# EAGLE board AVR_12V_reset4_forPrinting (EAGLE 8.5.2)
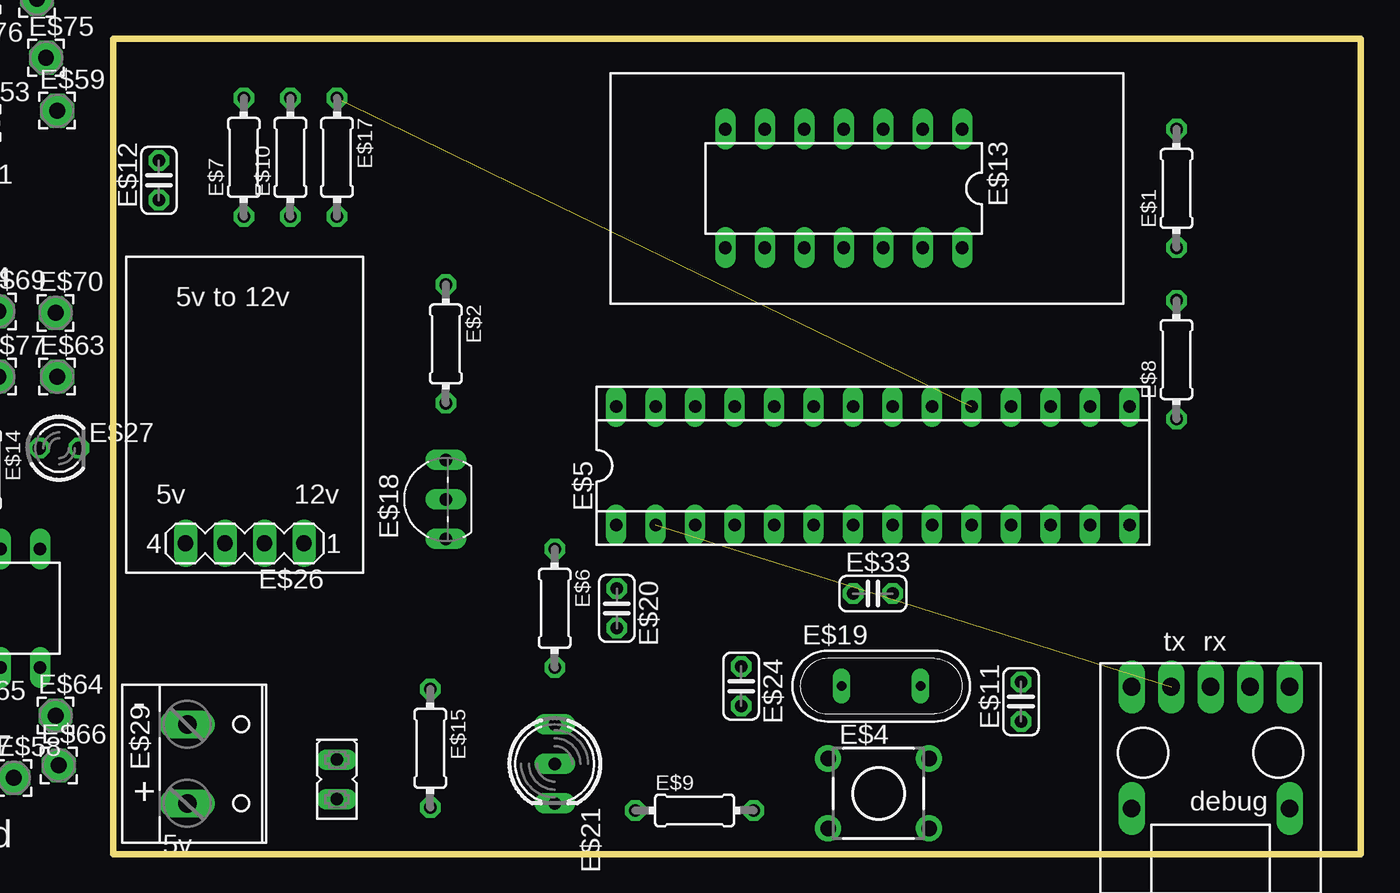
[diagram p0: board, top side]
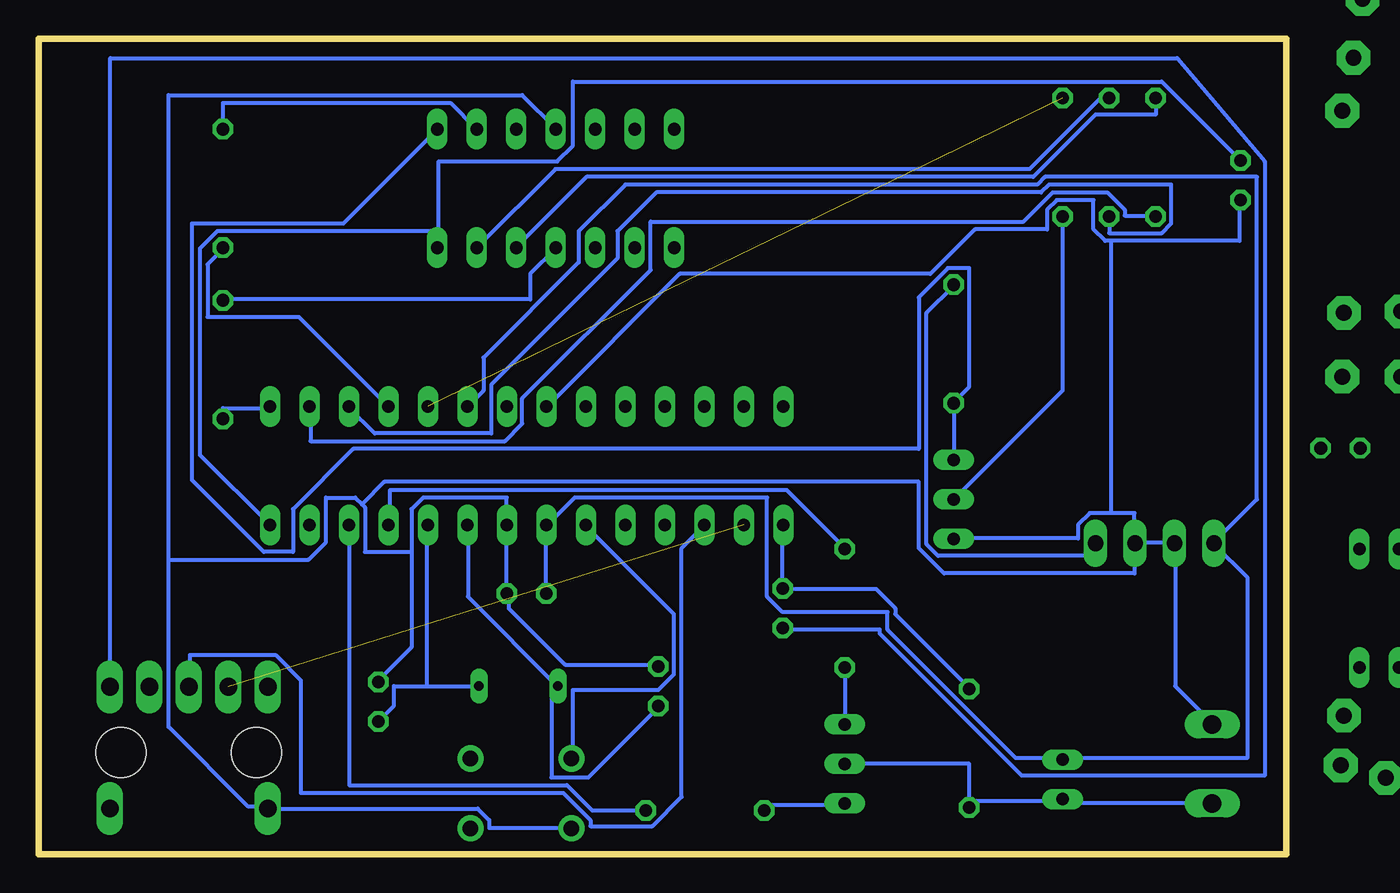
[diagram p1: board, bottom side, seen from below]

Size 80.25 x 52.42 mm. Coordinates in mm from the lower left corner, seen from the top.
Outline: 0,0 0,52.42 80.25,52.42 80.25,0 0,0
Copper layers (1*16): Top 0.035mm / dielectric 1.5mm / Bottom 0.035mm
Design rules "default": minimum track width 10mil, minimum drill 24mil, track to track 8mil, track to pad 8mil, pad to pad 8mil, via to via 8mil, smd to smd 8mil, copper to edge 40mil, drill to drill 8mil, minimum pad ring 10mil, minimum via ring 8mil, stop-mask expansion 4mil, vias tented up to drill 0mil, thermal gap 10mil

## Footprints (pad centres in the part's own frame; a part is rotated, then mirrored left to right if it is on the bottom)
0204/7 = drill 0.813 octagon: 1 -3.81,0; 2 3.81,0
FE02-1 = drill 0.813 long: 1 -1.27,0; 2 1.27,0
TL1105 = drill 1 pad 1.676: 1 -2.25,3.25; 2 2.25,3.25; 3 -2.25,-3.25; 4 2.25,-3.25
SOCKET-28-3 = drill 0.813 long: 1 -16.51,-3.81; 2 -13.97,-3.81; 3 -11.43,-3.81; 4 -8.89,-3.81; 5 -6.35,-3.81; 6 -3.81,-3.81; 7 -1.27,-3.81; 8 1.27,-3.81; 9 3.81,-3.81; 10 6.35,-3.81; 11 8.89,-3.81; 12 11.43,-3.81; 13 13.97,-3.81; 14 16.51,-3.81; 15 16.51,3.81; 16 13.97,3.81; 17 11.43,3.81; 18 8.89,3.81; 19 6.35,3.81; 20 3.81,3.81; 21 1.27,3.81; 22 -1.27,3.81; 23 -3.81,3.81; 24 -6.35,3.81; 25 -8.89,3.81; 26 -11.43,3.81; 27 -13.97,3.81; 28 -16.51,3.81
C025-024X044 = drill 0.813 octagon: 1 -1.27,0; 2 1.27,0
DIL14 = drill 0.813 long: 1 -7.62,-3.81; 2 -5.08,-3.81; 3 -2.54,-3.81; 4 0,-3.81; 5 2.54,-3.81; 6 5.08,-3.81; 7 7.62,-3.81; 8 7.62,3.81; 9 5.08,3.81; 10 2.54,3.81; 11 0,3.81; 12 -2.54,3.81; 13 -5.08,3.81; 14 -7.62,3.81
USB-MICRO-PCB = drill 1.143 long: P$1 -5.08,6.35; P$2 -2.54,6.35; P$3 0,6.35; P$4 2.54,6.35; P$5 5.08,6.35; P$6 5.08,-1.47; P$7 -5.08,-1.47 | hole 3.2: -4.34,2.12; 4.36,2.12
TO92- = drill 0.813 long: 1 2.54,0; 2 0,0; 3 -2.54,0
QS = drill 0.61 long: 1 -2.54,0; 2 2.54,0
DUOLED5MM = drill 0.813 long: AG -2.54,0; AR 2.54,0; K 0,0
MA04-1 = drill 1.016 long: 1 -3.81,0; 2 -1.27,0; 3 1.27,0; 4 3.81,0
LED3MM = drill 0.813 octagon: A -1.27,0; K 1.27,0
W237-132 = drill 1.194 long: 1 -2.54,-0.635; 2 2.54,-0.635
MCS10B = drill 1.016 pad 2.159 octagon: MP 0,0
DIL08 = drill 0.813 long: 1 -3.81,-3.81; 2 -1.27,-3.81; 3 1.27,-3.81; 4 3.81,-3.81; 5 3.81,3.81; 6 1.27,3.81; 7 -1.27,3.81; 8 -3.81,3.81
2,15/1,0 = drill 1.016 pad 2.159 octagon: 1 0,0

## Placement (x,y rotation side)
E$1  1k  [0204/7]  68.4,42.8 90 top
E$2  1k  [0204/7]  21.4,32.8 270 top
E$3  [FE02-1]  14.4,4.8 90 top
E$4  [TL1105]  49.23,3.89 270 top
E$5  [SOCKET-28-3]  48.87,24.97 0 top
E$6  220  [0204/7]  28.4,15.8 270 top
E$7  1k  [0204/7]  8.4,44.8 90 top
E$8  1k  [0204/7]  68.4,31.8 90 top
E$9  220  [0204/7]  37.4,2.8 0 top
E$10  1k  [0204/7]  11.4,44.8 90 top
E$11  22p  [C025-024X044]  58.4,9.8 90 top
E$12  [C025-024X044]  2.95,43.32 90 top
E$13  [DIL14]  47,42.8 180 top
E$14  220  [0204/7]  -8.24,24.72 270 top  (outside the outline)
E$15  10k  [0204/7]  20.4,6.8 270 top
E$16  [USB-MICRO-PCB]  70.6,4.4 0 top
E$17  2.2k  [0204/7]  14.4,44.8 270 top
E$18  s8050  [TO92-]  21.4,22.8 90 top
E$19  [QS]  49.4,10.8 0 top
E$20  [C025-024X044]  32.4,15.8 270 top
E$21  [DUOLED5MM]  28.4,5.8 270 top
E$24  22p  [C025-024X044]  40.4,10.8 270 top
E$26  [MA04-1]  8.46,19.98 180 top
E$27  [LED3MM]  -3.48,26.1 0 top
E$29  [W237-132]  5.4,5.8 270 top
E$33  1uF  [C025-024X044]  48.87,16.75 0 top
E$43  [MCS10B]  -12.85,26.57 0 top  (outside the outline)
E$45  [DIL08]  -8.52,15.8 0 top  (outside the outline)
E$46  [MCS10B]  -15.01,31.63 0 top  (outside the outline)
E$47  [MCS10B]  -15.29,22.57 0 top  (outside the outline)
E$48  [MCS10B]  -13.77,1.38 0 top  (outside the outline)
E$49  [2,15/1,0]  -12.8,51 0 top  (outside the outline)
E$50  [2,15/1,0]  -13,56.3 0 top  (outside the outline)
E$51  [2,15/1,0]  -9.5,41.7 0 top  (outside the outline)
E$52  [2,15/1,0]  -13.2,44.8 0 top  (outside the outline)
E$53  [2,15/1,0]  -8.4,47 0 top  (outside the outline)
E$54  [2,15/1,0]  -8.4,55.2 0 top  (outside the outline)
E$55  [2,15/1,0]  -12.9,9.5 0 top  (outside the outline)
E$56  [2,15/1,0]  -13.6,5.9 0 top  (outside the outline)
E$57  [2,15/1,0]  -9.6,5 0 top  (outside the outline)
E$58  [2,15/1,0]  -6.4,4.9 0 top  (outside the outline)
E$59  [2,15/1,0]  -3.6,47.8 0 top  (outside the outline)
E$60  [2,15/1,0]  -12.8,47.5 0 top  (outside the outline)
E$61  [2,15/1,0]  -3.1,57.6 0 top  (outside the outline)
E$62  [2,15/1,0]  -4.9,55 0 top  (outside the outline)
E$63  [2,15/1,0]  -3.6,30.7 0 top  (outside the outline)
E$64  [2,15/1,0]  -3.7,8.9 0 top  (outside the outline)
E$65  [2,15/1,0]  -8.7,8.5 0 top  (outside the outline)
E$66  [2,15/1,0]  -3.5,5.7 0 top  (outside the outline)
E$67  [2,15/1,0]  -12.1,34.8 0 top  (outside the outline)
E$68  [2,15/1,0]  -12.7,53.6 0 top  (outside the outline)
E$69  [2,15/1,0]  -7.4,34.9 0 top  (outside the outline)
E$70  [2,15/1,0]  -3.7,34.8 0 top  (outside the outline)
E$71  [2,15/1,0]  -10,58.2 0 top  (outside the outline)
E$72  [2,15/1,0]  -6.4,58 0 top  (outside the outline)
E$73  [2,15/1,0]  -13.5,38.4 0 top  (outside the outline)
E$74  [2,15/1,0]  -9.7,35.1 0 top  (outside the outline)
E$75  [2,15/1,0]  -4.32,51.21 0 top  (outside the outline)
E$76  [2,15/1,0]  -8.86,50.83 0 top  (outside the outline)
E$77  [2,15/1,0]  -7.4,30.7 0 top  (outside the outline)
E$78  [2,15/1,0]  -10.4,30.9 0 top  (outside the outline)

## Library data of the parts
E$1 E$2 E$6-E$10 E$14 E$15 E$17 = eagle-ltspice
E$3 = con-lsta2
E$4 = switch
E$5 = ic-package
E$11 E$12 E$20 E$24 E$33 = ref-packages
E$13 = 74ac-logic
E$16 = LSGPackages
E$18 = transistor-fet
E$19 = special
E$21 E$27 = led
E$26 = con-lstb
E$29 = con-wago-508
E$43 E$46-E$48 = solpad
E$45 = 74xx-us
E$49-E$78 = wirepad

## Nets
12V: E$2.1 E$26.1
GND: E$4.4 E$5.8 E$5.22 E$11.2 E$12.1 E$13.4 E$16.P$7 E$18.3 E$24.1 E$26.2 E$26.3 E$29.1 E$33.2
S$2: E$1.2 E$13.2
S$3: E$5.15 E$8.1
S$4: E$17.2 E$18.2
S$5: E$5.2 E$16.P$2
S$7: E$2.2 E$13.1 E$18.1
S$8: E$5.14 E$12.2 E$13.14
S$9: E$5.10 E$11.1 E$19.2
S$10: E$5.9 E$19.1 E$24.2
S$11: E$5.3 E$16.P$3
S$12: E$6.2 E$21.AG
S$13: E$5.16 E$7.1
S$14: E$7.2 E$13.12
S$15: E$5.17 E$10.1
S$16: E$3.1 E$15.2 E$21.K E$29.2
S$17: E$1.1 E$5.18
S$18: E$8.2 E$13.11
S$19: E$5.19 E$17.1
S$20: E$16.P$5 E$20.2
S$21: E$4.3 E$5.6
S$22: E$9.1 E$21.AR
S$23: E$5.11 E$6.1
S$24: E$5.12 E$9.2
S$26: E$10.2 E$13.13
S$27: E$5.1 E$15.1 E$20.1
VCC: E$3.2 E$5.7 E$5.20 E$26.4 E$33.1

## Tracks (layer width: path | path; a pad name or v marks a point on that pad's centre or on a via)
12V
  Bottom 0.254: E$26.1 12.27,19.18 22.4,19.18 23.15,19.93 23.15,34.8 21.4,36.55 E$2.1
GND
  Bottom 0.254: E$24.1 40.4,12.18 46.4,12.18 50.02,15.8 50.02,16.68 E$33.2 50.15,16.8 50.15,21.05 E$5.8 50.15,21.18 50.15,22.93 55.52,22.93 56.27,22.18 56.27,19.43 | 56.27,19.43 56.27,13.3 58.4,11.18 E$11.2 | 71.9,18.93 71.9,8.18 66.78,3.05 65.53,3.05 E$16.P$7 65.4,2.92 52.02,2.92 51.27,2.17 51.27,1.67 46.02,1.67 E$4.4 | 71.9,18.93 71.9,48.8 49.15,48.8 47.02,46.67 E$13.4 | 56.27,19.43 59.27,19.43 59.27,22.3 59.46,22.49 | 59.46,22.49 59.9,22.93 61.77,22.93 61.77,20.05 62.9,18.93 71.9,18.93 | 11.27,21.93 9.77,21.93 9.77,20.05 E$26.2 | 11.27,21.93 12.65,21.93 13.4,21.18 13.4,20.3 21.4,20.3 E$18.3 | E$26.2 9.65,20.05 7.27,20.05 E$26.3 7.15,19.93 7.15,10.8 4.77,8.43 E$29.1 | 11.27,39.42 3.02,39.42 3.02,42.05 E$12.1 | 11.27,39.42 11.65,39.42 12.4,40.17 12.4,42.05 14.77,42.05 15.4,41.42 15.4,40.17 20.02,40.17 22.9,37.3 39.02,37.3 47.52,28.8 E$5.22 | 11.27,39.42 11.27,21.93 | 59.46,22.49 58.02,23.93 23.65,23.93 23.65,19.68 22.02,18.05 9.77,18.05 9.77,19.93 E$26.2
S$2
  Bottom 0.254: E$1.2 68.4,48.3 53.77,48.3 52.15,46.67 E$13.2
S$3
  Bottom 0.254: E$8.1 68.4,28.68 65.4,28.68 E$5.15
S$4
  Bottom 0.254: E$18.2 14.4,29.8 E$17.2
S$5  (1 unrouted)
S$7
  Bottom 0.254: E$18.1 E$2.2 21.4,29.05 20.4,30.05 20.4,37.67 21.77,37.67 23.65,35.8 23.65,26.05 60.02,26.05 63.9,22.18 63.9,19.43 65.78,19.43 70.4,24.05 70.4,40.55 60.65,40.55 54.65,46.55 E$13.1
S$8
  Bottom 0.254: E$12.2 8.02,49.67 45.9,49.67 45.9,45.55 46.9,44.55 54.52,44.55 54.52,39.05 E$13.14 54.65,40.05 68.78,40.05 69.9,38.92 69.9,25.68 E$5.14
S$9
  Bottom 0.254: 55.27,10.8 57.4,10.8 57.4,9.55 58.4,8.55 E$11.1 | 55.27,10.8 E$19.2 | 55.27,10.8 55.27,21.05 E$5.10
S$10
  Bottom 0.254: E$5.9 52.65,21.05 52.65,16.55 46.9,10.8 E$19.1 47.27,11.05 47.27,4.92 44.9,4.92 40.4,9.43 E$24.2
S$11
  Bottom 0.254: E$5.3 37.52,21.05 38.9,19.68 38.9,3.67 40.77,1.8 44.77,1.8 44.77,2.17 46.52,3.92 63.4,3.92 63.4,11.18 65.03,12.8 70.53,12.8 70.53,10.8 E$16.P$3
S$12
  Bottom 0.254: E$6.2 E$21.AG
S$13
  Bottom 0.254: E$7.1 8.4,41.05 10.4,41.05 10.4,41.42 11.52,42.55 15.02,42.55 16.9,40.67 40.9,40.67 40.9,37.55 49.15,29.3 49.15,27.68 50.27,26.55 62.77,26.55 62.77,28.68 E$5.16
S$14
  Bottom 0.254: E$7.2 8.4,47.55 12.27,47.55 16.27,43.55 45.02,43.55 49.52,39.05 E$13.12
S$15
  Bottom 0.254: E$10.1 11.4,39.92 8.02,39.92 7.4,40.55 7.4,43.05 15.27,43.05 15.77,42.55 40.52,42.55 43.02,40.05 43.02,38.3 51.15,30.18 51.15,27.05 58.65,27.05 60.27,28.68 E$5.17
S$16
  Bottom 0.254: E$21.K 20.4,5.8 E$15.2 20.4,3.42 14.4,3.42 E$3.1 14.27,3.42 14.27,3.3 4.77,3.3 E$29.2
S$17
  Bottom 0.254: E$5.18 57.77,28.8 63.52,34.55 69.4,34.55 69.4,37.92 68.4,38.92 E$1.1
S$18
  Bottom 0.254: E$8.2 68.4,35.67 48.65,35.67 48.65,37.3 47.02,38.92 E$13.11
S$19  (1 unrouted)
S$20
  Bottom 0.254: E$20.2 32.4,14.43 26.15,14.43 26.15,14.18 17.02,5.05 1.4,5.05 1.4,44.55 7.02,51.17 75.65,51.17 75.65,10.8 E$16.P$5
S$21
  Bottom 0.254: E$5.6 45.02,21.05 39.4,15.43 39.4,11.55 40.4,10.55 45.9,10.55 45.9,6.17 E$4.3
S$22
  Bottom 0.254: E$21.AR 28.4,3.17 33.52,3.17 33.52,2.8 E$9.1
S$23
  Bottom 0.254: E$6.1 28.4,19.68 32.15,23.43 57.65,23.43 57.65,21.18 E$5.11
S$24
  Bottom 0.254: E$9.2 44.65,2.8 46.27,4.42 60.27,4.42 60.27,21.05 E$5.12
S$26
  Bottom 0.254: E$13.13 52.02,39.05 47.02,44.05 16.52,44.05 12.02,48.55 11.4,48.55 E$10.2
S$27
  Bottom 0.254: E$15.1 20.4,10.68 25.15,15.43 25.15,15.8 26.4,17.05 32.4,17.05 E$20.1 32.4,21.05 E$5.1
VCC
  Bottom 0.254: E$33.1 47.65,16.8 47.65,21.05 E$5.7 47.52,21.18 45.77,22.93 33.4,22.93 33.4,16.55 32.4,15.55 25.65,15.55 25.65,14.43 17.4,6.17 14.52,6.17 E$3.2 14.4,6.17 2.52,6.17 2.52,17.8 4.65,19.93 E$26.4 4.65,20.05 1.9,22.8 1.9,43.55 15.52,43.55 16.02,43.05 42.52,43.05 45.52,40.05 45.52,38.05 51.65,31.93 51.65,29.8 52.65,28.8 E$5.20

## Text on the board
tPlace: green | 5v to 12v | 5v | 12v | tx | rx | - | + | debug | red | 5v